# Altium PCB RF-36-S1 V1.0.PcbDoc
Units mm, origin at the board's own origin, x right, y up, seen from the top; angles counter-clockwise.
Board outline 80 x 80.71 mm, 2 copper layers (Top Layer, Bottom Layer); 68 components, 52 nets, 214 pads, 75 vias.
Unrouted connection lines stored in the file: 42.
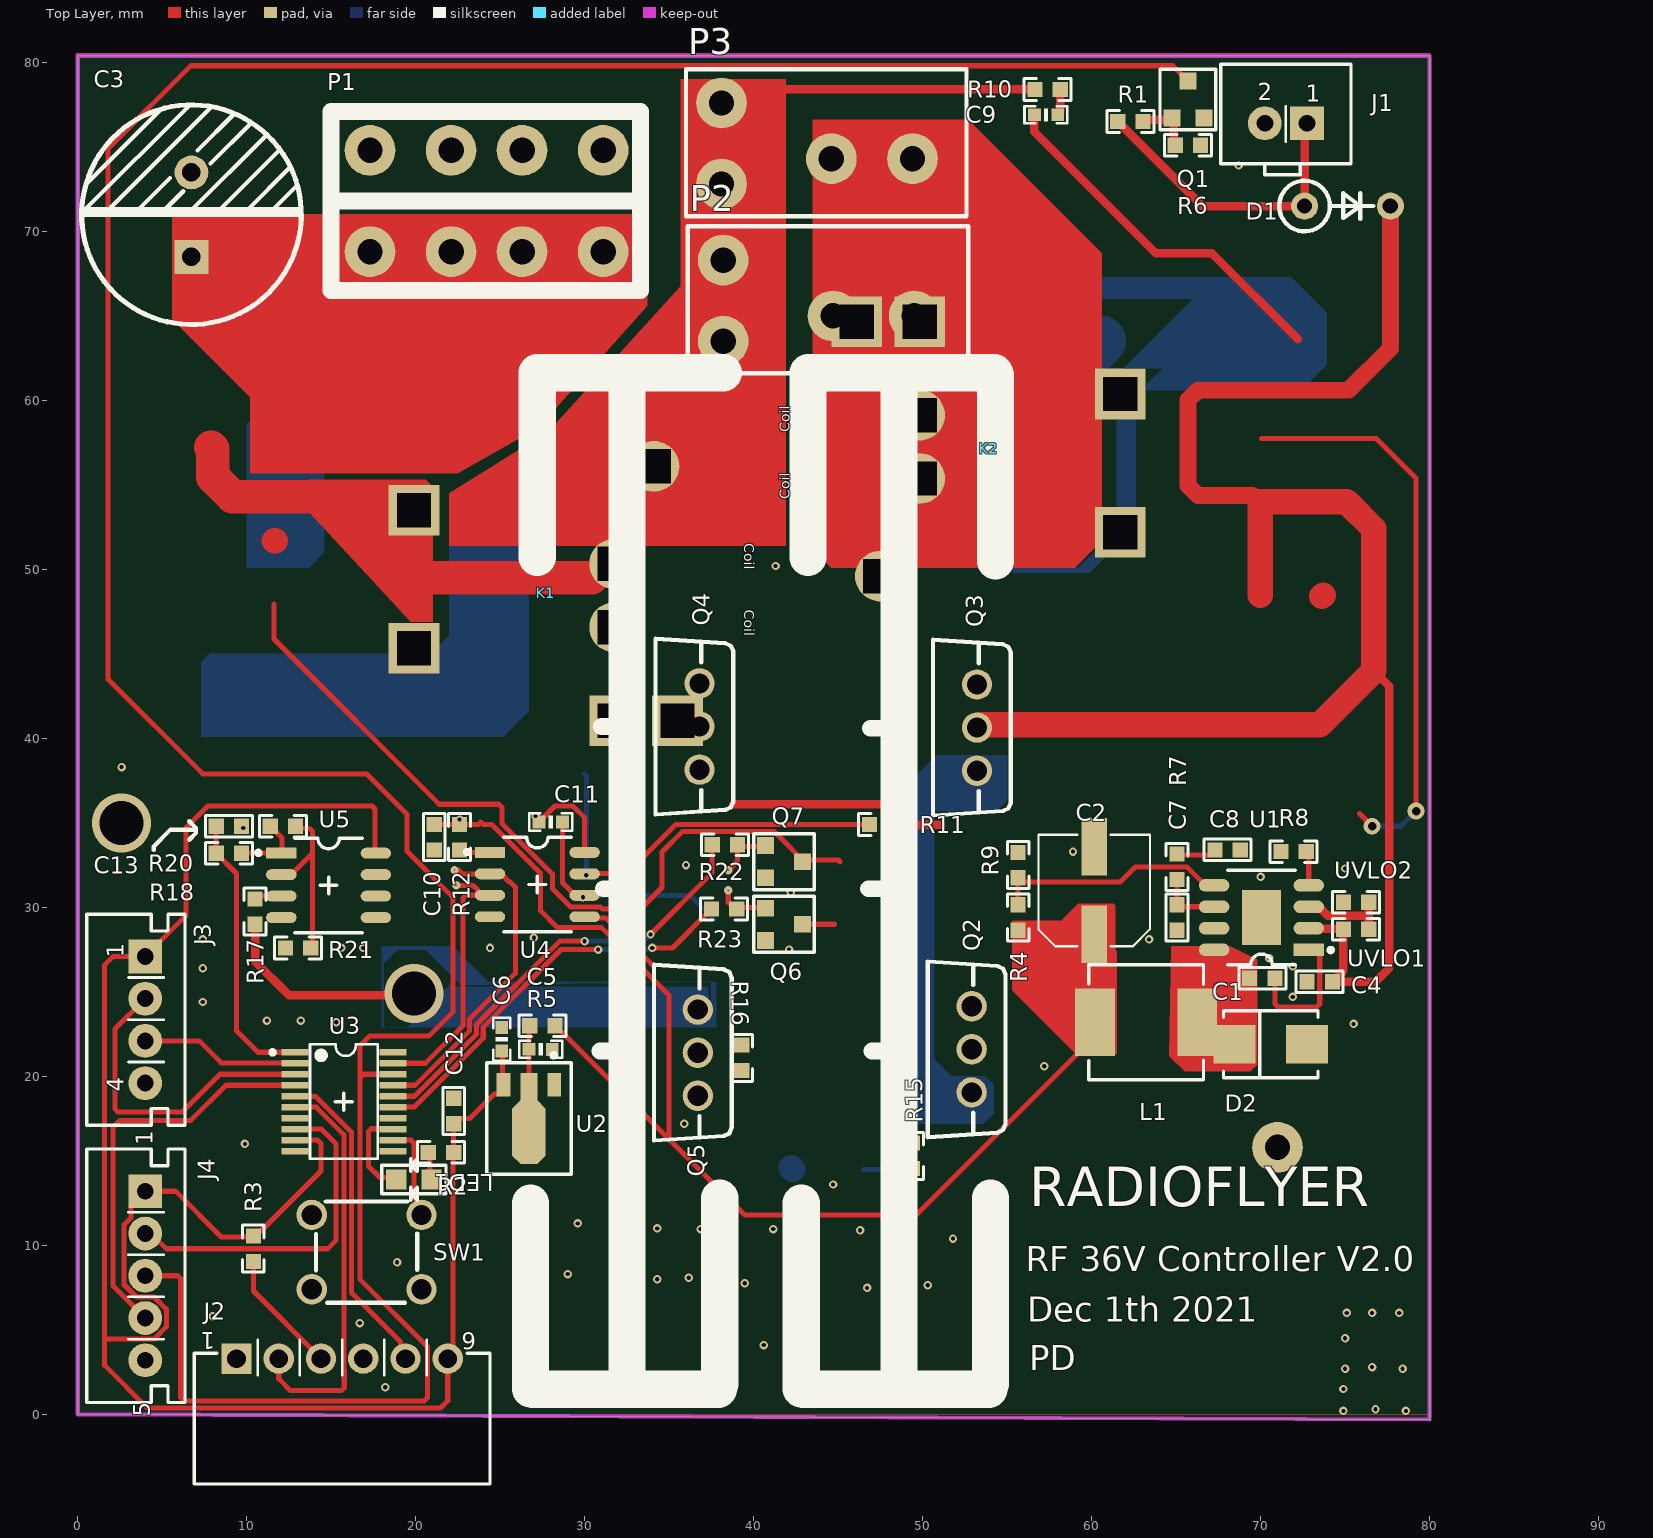
[diagram p0: Top Layer view]
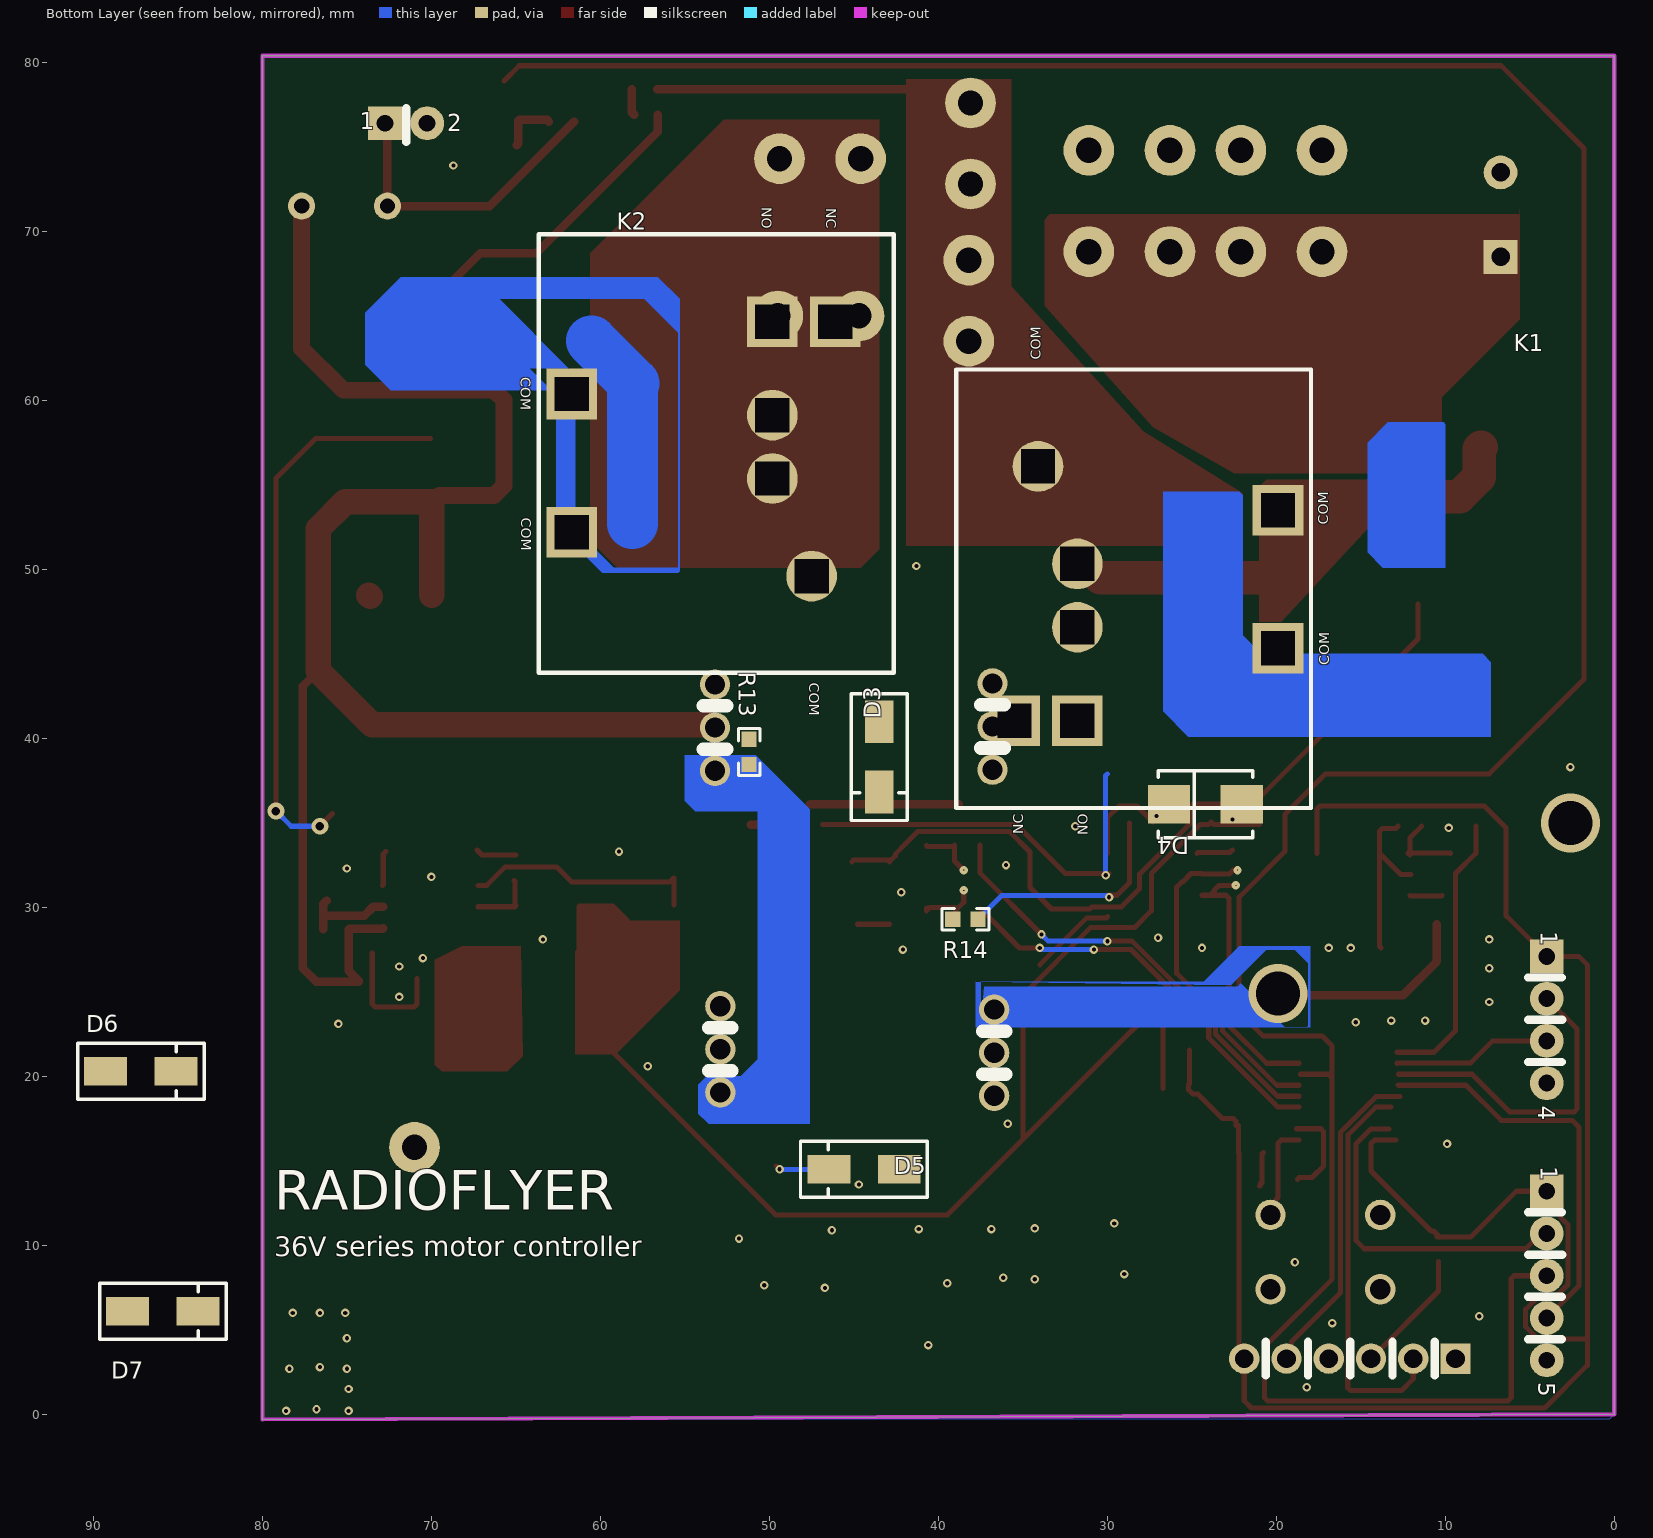
[diagram p1: Bottom Layer view, seen from below]
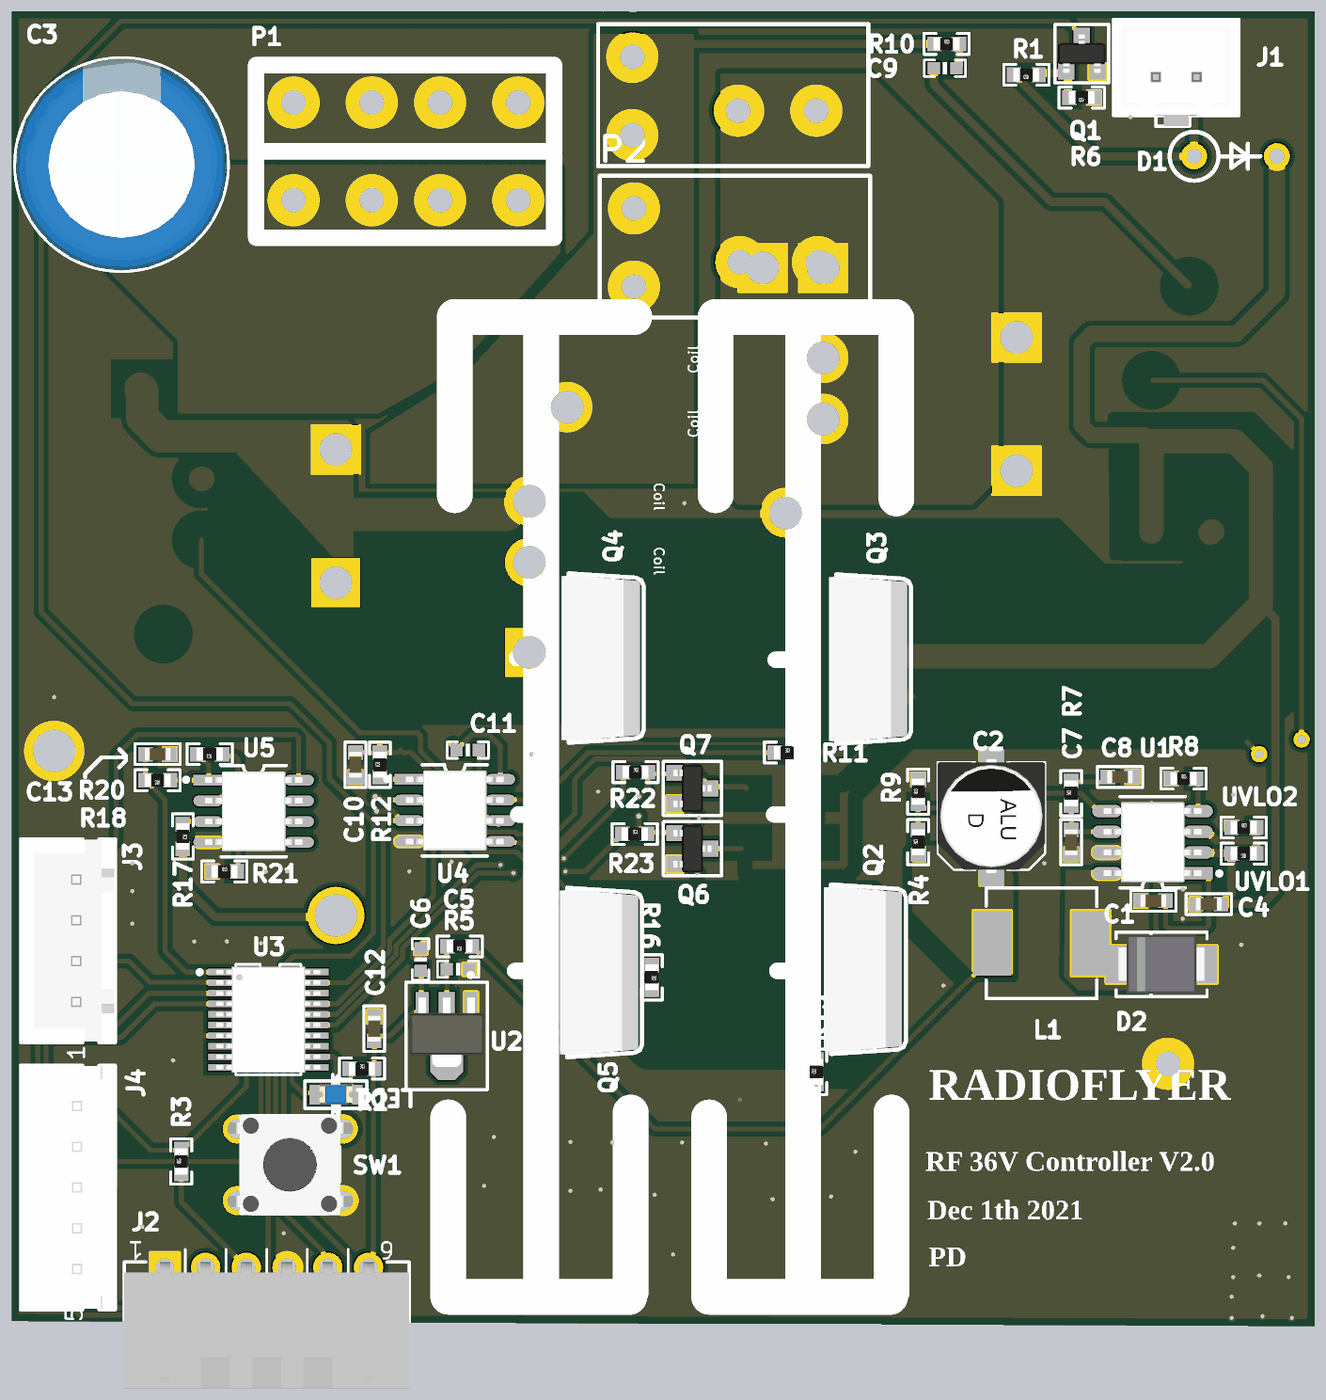
[diagram p2: 3D render of the assembled board from above, using the file's embedded part models]
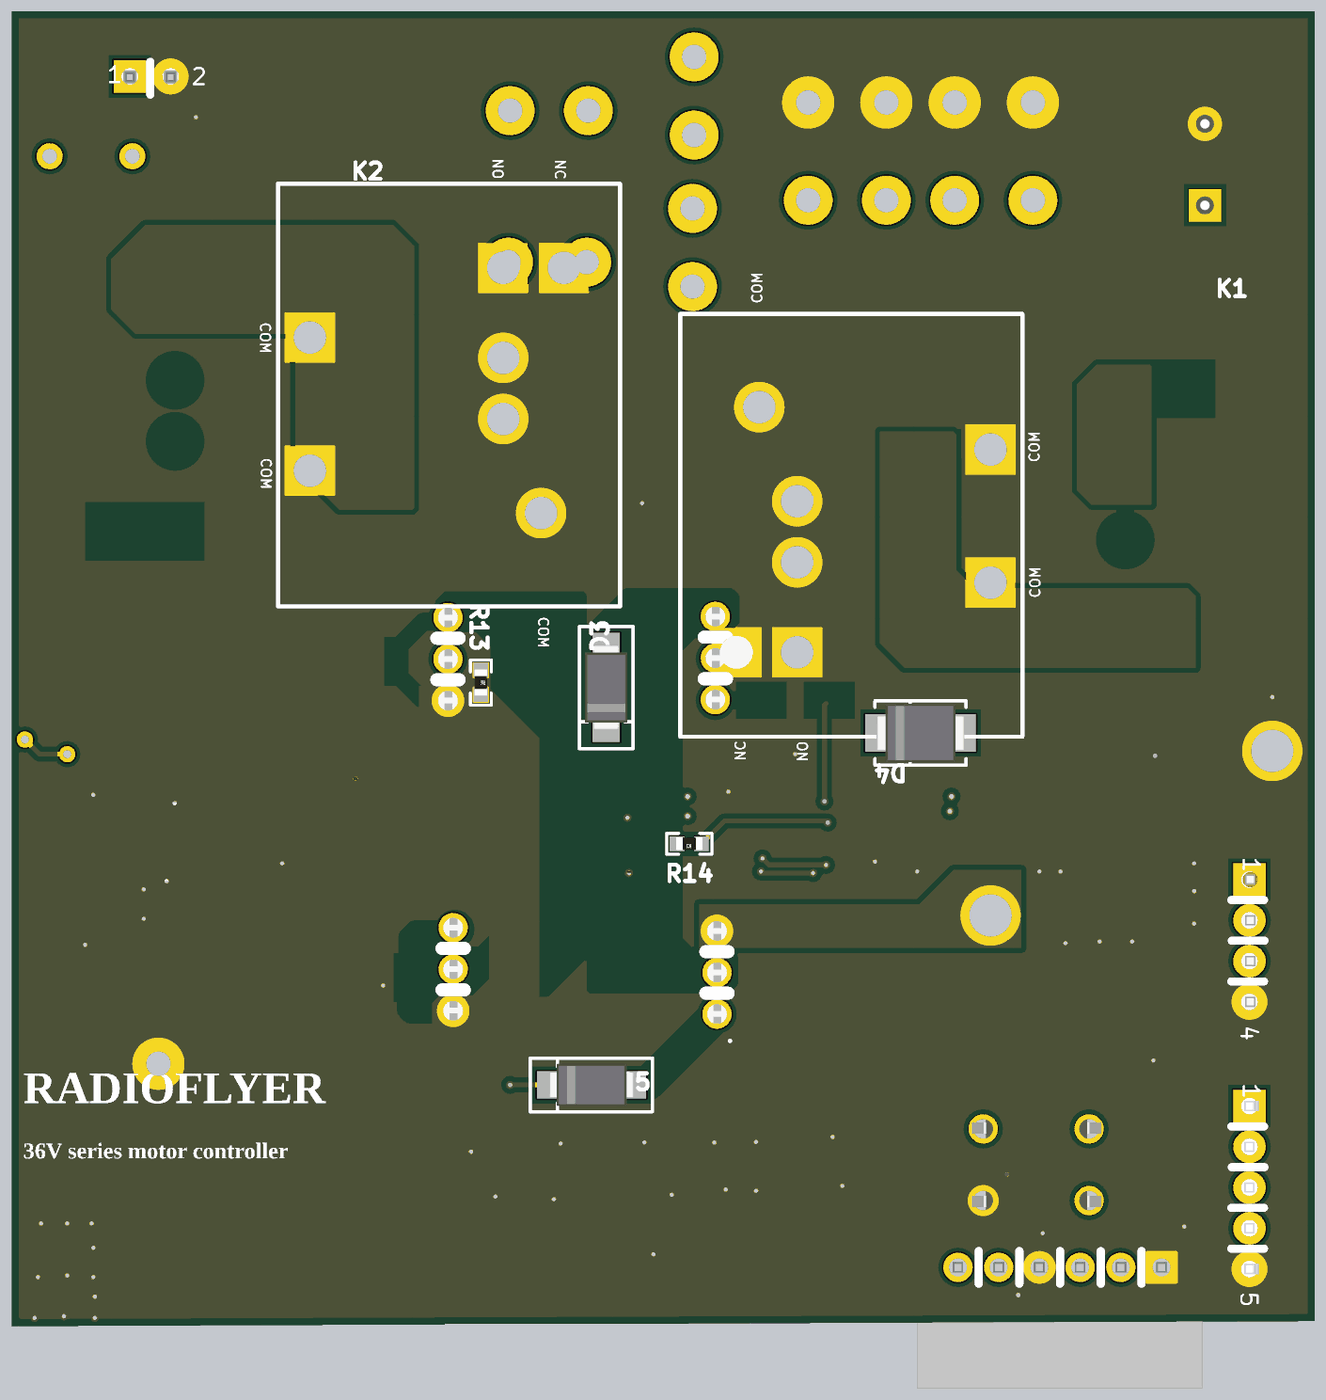
[diagram p3: 3D render of the assembled board from below, using the file's embedded part models]

## Layer stack, top to bottom
Top Solder: solder mask 0.0102, Solder Resist, Dk 3.5
Top Layer: signal copper 0.0356
Dielectric 1: dielectric 0.32, FR-4, Dk 4.8
Bottom Layer: signal copper 0.0356
Bottom Solder: solder mask 0.0102, Solder Resist, Dk 3.5

## Board outline
0,0 0,80.4 80,80.4 80,-0.308 79.999,-0.308

## Design rules (kind name [scope] priority, off if disabled: settings)
Clearance Clearance_13 [InNamedPolygon('gm') Or InNamedPolygon('NONET_L02_P007')] p1: gap=0.3 ignorepadtopadclearanceinfootprint=FALSE
Clearance Clearance_12 [InNamedPolygon('NONET_L02_P007')] p2: gap=0.3 ignorepadtopadclearanceinfootprint=FALSE
Clearance Clearance_11 [InNamedPolygon('NONET_L01_P003')] p3: gap=0.3 ignorepadtopadclearanceinfootprint=FALSE
Clearance Clearance_10 [InNamedPolygon('NONET_L01_P003')] p4: gap=0.3 ignorepadtopadclearanceinfootprint=FALSE
Clearance Clearance_9 [InNamedPolygon('NONET_L01_P003')] p5: gap=0.254 ignorepadtopadclearanceinfootprint=FALSE except(0: Arc-Hole Track-Hole SMDPad-Hole THPad-Hole Via-Hole Fill-Hole Poly-Hole Region-Hole Text-Hole)
Clearance Clearance_8 [InNamedPolygon('GND_L01_P000')] p6: gap=0.3 ignorepadtopadclearanceinfootprint=FALSE
Clearance Clearance_7 [InNamedPolygon('GND_L02_P002')] p7: gap=0.3 ignorepadtopadclearanceinfootprint=FALSE
Clearance Clearance_6 [InNamedPolygon('GND_L02_P002')] p8: gap=3 ignorepadtopadclearanceinfootprint=FALSE
Clearance Clearance_5 [InNamedPolygon('GND_L01_P000')] p9: gap=3 ignorepadtopadclearanceinfootprint=FALSE
Clearance Clearance_4 [InNamedPolygon('GND_L02_P002')] p10: gap=0.2 ignorepadtopadclearanceinfootprint=FALSE
Clearance Clearance_3 [InNamedPolygon('GND_L02_P002')] p11: gap=0.2 ignorepadtopadclearanceinfootprint=FALSE
Clearance Clearance_2 [InNamedPolygon('GND_L02_P002')] p12: gap=0.1 ignorepadtopadclearanceinfootprint=FALSE
Clearance Clearance_1 [InNamedPolygon('GND_L02_P002')] p13: gap=0.254 ignorepadtopadclearanceinfootprint=FALSE except(0: Arc-Hole Track-Hole SMDPad-Hole THPad-Hole Via-Hole Fill-Hole Poly-Hole Region-Hole Text-Hole)
Clearance [All] p14: gap=0.1 ignorepadtopadclearanceinfootprint=FALSE
PlaneConnect [All] p1: planeconnectstyle=Direct reliefexpansion=0.508 reliefentries=4 reliefconductorwidth=0.254 reliefairgap=0.254
PolygonConnect PolygonConnect_13 [All vs IsNamedPolygon('NONET_L02_P007')] p1: connectstyle=Direct reliefconductorwidth=0.254 reliefentries=4 polygonreliefangle="90 Angle" airgapwidth=0.254
PolygonConnect PolygonConnect_12 [All vs IsNamedPolygon('GND_L02_P002')] p2: thpad.connectstyle=Direct thpad.reliefconductorwidth=0.254 thpad.reliefentries=4 thpad.polygonreliefangle="90 Angle" thpad.airgapwidth=0.254 smdpad.connectstyle=Direct smdpad.reliefconductorwidth=0.254 smdpad.reliefentries=4 smdpad.polygonreliefangle="90 Angle" smdpad.airgapwidth=0.254 via.connectstyle=Relief via.reliefconductorwidth=0.254 via.reliefentries=4 via.polygonreliefangle="90 Angle" via.airgapwidth=0.254
PolygonConnect PolygonConnect_11 [All vs IsNamedPolygon('dr')] p3: thpad.connectstyle=Direct thpad.reliefconductorwidth=0.254 thpad.reliefentries=4 thpad.polygonreliefangle="90 Angle" thpad.airgapwidth=0.254 smdpad.connectstyle=Direct smdpad.reliefconductorwidth=0.254 smdpad.reliefentries=4 smdpad.polygonreliefangle="90 Angle" smdpad.airgapwidth=0.254 via.connectstyle=Relief via.reliefconductorwidth=0.254 via.reliefentries=4 via.polygonreliefangle="90 Angle" via.airgapwidth=0.254
PolygonConnect PolygonConnect_10 [All vs IsNamedPolygon('NONET_L01_P003')] p4: thpad.connectstyle=Direct thpad.reliefconductorwidth=0.254 thpad.reliefentries=4 thpad.polygonreliefangle="90 Angle" thpad.airgapwidth=0.254 smdpad.connectstyle=Direct smdpad.reliefconductorwidth=0.254 smdpad.reliefentries=4 smdpad.polygonreliefangle="90 Angle" smdpad.airgapwidth=0.254 via.connectstyle=Relief via.reliefconductorwidth=0.254 via.reliefentries=4 via.polygonreliefangle="90 Angle" via.airgapwidth=0.254
PolygonConnect PolygonConnect_9 [All vs IsNamedPolygon('NONET_L01_P003')] p5: thpad.connectstyle=Direct thpad.reliefconductorwidth=0.254 thpad.reliefentries=4 thpad.polygonreliefangle="90 Angle" thpad.airgapwidth=0.254 smdpad.connectstyle=Direct smdpad.reliefconductorwidth=0.254 smdpad.reliefentries=4 smdpad.polygonreliefangle="90 Angle" smdpad.airgapwidth=0.254 via.connectstyle=Relief via.reliefconductorwidth=0.254 via.reliefentries=4 via.polygonreliefangle="90 Angle" via.airgapwidth=0.254
PolygonConnect PolygonConnect_8 [All vs IsNamedPolygon('NONET_L01_P003')] p6: thpad.connectstyle=Direct thpad.reliefconductorwidth=0.254 thpad.reliefentries=4 thpad.polygonreliefangle="90 Angle" thpad.airgapwidth=0.254 smdpad.connectstyle=Direct smdpad.reliefconductorwidth=0.254 smdpad.reliefentries=4 smdpad.polygonreliefangle="90 Angle" smdpad.airgapwidth=0.254 via.connectstyle=Relief via.reliefconductorwidth=0.254 via.reliefentries=4 via.polygonreliefangle="90 Angle" via.airgapwidth=0.254
PolygonConnect PolygonConnect_7 [All vs IsNamedPolygon('NONET_L01_P003')] p7: thpad.connectstyle=Direct thpad.reliefconductorwidth=0.254 thpad.reliefentries=4 thpad.polygonreliefangle="90 Angle" thpad.airgapwidth=0.254 smdpad.connectstyle=Direct smdpad.reliefconductorwidth=0.254 smdpad.reliefentries=4 smdpad.polygonreliefangle="90 Angle" smdpad.airgapwidth=0.254 via.connectstyle=Relief via.reliefconductorwidth=0.254 via.reliefentries=4 via.polygonreliefangle="90 Angle" via.airgapwidth=0.254
PolygonConnect PolygonConnect_6 [All vs IsNamedPolygon('GND_L01_P000')] p8: thpad.connectstyle=Direct thpad.reliefconductorwidth=0.254 thpad.reliefentries=4 thpad.polygonreliefangle="90 Angle" thpad.airgapwidth=0.254 smdpad.connectstyle=Direct smdpad.reliefconductorwidth=0.254 smdpad.reliefentries=4 smdpad.polygonreliefangle="90 Angle" smdpad.airgapwidth=0.254 via.connectstyle=Relief via.reliefconductorwidth=0.254 via.reliefentries=4 via.polygonreliefangle="90 Angle" via.airgapwidth=0.254
PolygonConnect PolygonConnect_5 [All vs IsNamedPolygon('GND_L02_P002')] p9: thpad.connectstyle=Direct thpad.reliefconductorwidth=0.254 thpad.reliefentries=4 thpad.polygonreliefangle="90 Angle" thpad.airgapwidth=0.254 smdpad.connectstyle=Direct smdpad.reliefconductorwidth=0.254 smdpad.reliefentries=4 smdpad.polygonreliefangle="90 Angle" smdpad.airgapwidth=0.254 via.connectstyle=Relief via.reliefconductorwidth=0.254 via.reliefentries=4 via.polygonreliefangle="90 Angle" via.airgapwidth=0.254
PolygonConnect PolygonConnect_4 [All vs IsNamedPolygon('GND_L02_P002')] p10: thpad.connectstyle=Direct thpad.reliefconductorwidth=0.254 thpad.reliefentries=4 thpad.polygonreliefangle="90 Angle" thpad.airgapwidth=0.254 smdpad.connectstyle=Direct smdpad.reliefconductorwidth=0.254 smdpad.reliefentries=4 smdpad.polygonreliefangle="90 Angle" smdpad.airgapwidth=0.254 via.connectstyle=Relief via.reliefconductorwidth=0.254 via.reliefentries=4 via.polygonreliefangle="90 Angle" via.airgapwidth=0.254
PolygonConnect PolygonConnect_3 [All vs IsNamedPolygon('GND_L02_P002')] p11: thpad.connectstyle=Direct thpad.reliefconductorwidth=0.254 thpad.reliefentries=4 thpad.polygonreliefangle="90 Angle" thpad.airgapwidth=0.254 smdpad.connectstyle=Direct smdpad.reliefconductorwidth=0.254 smdpad.reliefentries=4 smdpad.polygonreliefangle="90 Angle" smdpad.airgapwidth=0.254 via.connectstyle=Relief via.reliefconductorwidth=0.254 via.reliefentries=4 via.polygonreliefangle="90 Angle" via.airgapwidth=0.254
PolygonConnect PolygonConnect_2 [All vs IsNamedPolygon('GND_L02_P002')] p12: thpad.connectstyle=Direct thpad.reliefconductorwidth=0.254 thpad.reliefentries=4 thpad.polygonreliefangle="90 Angle" thpad.airgapwidth=0.254 smdpad.connectstyle=Direct smdpad.reliefconductorwidth=0.254 smdpad.reliefentries=4 smdpad.polygonreliefangle="90 Angle" smdpad.airgapwidth=0.254 via.connectstyle=Relief via.reliefconductorwidth=0.254 via.reliefentries=4 via.polygonreliefangle="90 Angle" via.airgapwidth=0.254
PolygonConnect PolygonConnect_1 [All vs IsNamedPolygon('GND_L02_P002')] p13: thpad.connectstyle=Direct thpad.reliefconductorwidth=0.254 thpad.reliefentries=4 thpad.polygonreliefangle="90 Angle" thpad.airgapwidth=0.254 smdpad.connectstyle=Direct smdpad.reliefconductorwidth=0.254 smdpad.reliefentries=4 smdpad.polygonreliefangle="90 Angle" smdpad.airgapwidth=0.254 via.connectstyle=Relief via.reliefconductorwidth=0.254 via.reliefentries=4 via.polygonreliefangle="90 Angle" via.airgapwidth=0.254
PolygonConnect [All] p14: connectstyle=Direct reliefconductorwidth=0.254 reliefentries=4 polygonreliefangle="90 Angle" airgapwidth=0.254
RoutingVias [All] p1: holewidth=0.711 width=1.27 viastyle="Through Hole" minholewidth=0.711 minwidth=1.27 maxholewidth=0.711 maxwidth=1.27
SolderMaskExpansion [All] p1: expansion=0.102 istentingtop=FALSE
Width [All] p1: maxlimit=3 minlimit=0.254 preferedwidth=0.254
29 further rules are at their usual default settings.

## Components (designator, comment, footprint, x,y, rotation, side; value= is the part's Value field where it differs from the comment)
C1 "PXL456470-1530" CAPC0603-RW 70.1,25.8 r180 top value=0.1uF
C2 "PBE099540-1010" "CASE - D" 60.15,31 r270 top value=20uF
C3 "PVE599570-4710" CAP_Radial_D13L25P5.0 6.735,70.989 r270 top value=1000uF
C4 "PXL456470-1530" CAPC0603-RW 73.5,25.6 r180 top value=4.7uF
C5 "4.7uF" 0603P 27.4,21.6 r180 top
C6 "4.7uF" 0603P 25.1,22.2 r270 top
C7 "PXL456470-1530" CAPC0603-RW 65.05,29.4 r270 top value=68pF
C8 "PXL456470-1530" CAPC0603-RW 68.05,33.4 r0 top value=6.8nF
C9 "104" 0603P 57.3,76.9 r0 top
C10 "PXL456470-1530" CAPC0603-RW 21.1,34.15 r270 top value=1uF
C11 "4.7uF" 0603P 28,35.05 r180 top
C12 "PXL456470-1530" CAPC0603-RW 22.25,17.95 r90 top value=4.7uF
C13 "PXL456470-1530" CAPC0603-RW 8.95,34.8 r0 top value=104
D1 "RAD114004-0010" DO-41-V-P5.08 72.6,71.5 r0 top
D2 "T571002930249" SMB 70.6,21.9 r180 top
D3 "SMAJ36A-13-F" SMA 43.5,38.9 r270 bottom
D4 "T571002930249" SMB 24.2,36.1 r0 bottom
D5 "SMAJ36A-13-F" SMA 44.4,14.5 r0 bottom
D6 "SMAJ36A-13-F" SMA 87.2,20.3 r180 bottom
D7 "SMAJ36A-13-F" SMA 85.9,6.1 r180 bottom
J1 "T690300125300" "CONN 2P PH=2.5mm HAA250A-2 WHITE" 71.5,76.4 r0 top value=2.5mm
J2 "T690300121600" "CONN 6P PH=2.5mm RA XHB-6AW-KL" 15.65,3.3 r180 top value=2.5mm
J3 "CCN250000-0104" "CONN 4P PH=2.5mm B4B-XH-A" 4,23.35 r90 top value=2.5mm
J4 "CCN250000-0105" "CONN 5P PH=2.5mm B5B-XH-A" 4,8.2 r90 top value=2.5mm
K1 "SLB4119" "RELAY SLB4119" 21.7,56 r270 top
K2 "SLB4119" "RELAY SLB4119" 59.9,49.7 r90 top
L1 "T621000090500" "IND CSAB0740" 63.225,23.2 r180 top value=22uH
LED1 "T575011290263" LED0805-Blue 19.9,13.9 r180 top
P1 "CJP012009-0050" "Bat connector" 31.1,68.8 r180 top
P2 "CJP012009-0050" "Motor connector" 36.1,61.6 r90 top
P3 "CJP012009-0050" "Motor connector" 36,70.9 r90 top
Q1 "RCN000846-0001" SOT23-132-RW 65.7,77.8 r0 top
Q2 "RHM120060-1001" TO220-F 52.9,19.05 r90 top
Q3 "RHM120060-1001" TO220-F 53.219,38.087 r90 top
Q4 "RHM120060-1001" TO220-F 36.8,38.15 r90 top
Q5 "RHM120060-1001" TO220-F 36.7,18.85 r90 top
Q6 "RCN000846-0001" SOT23-132-RW 41.8,29 r270 top
Q7 "RCN000846-0001" SOT23-132-RW 41.8,32.7 r270 top
R1 "T501348102129" 0603-RW 62.3,76.5 r180 top value=22k
R2 "T501348102129" 0603-RW 21.5,15.5 r0 top value=1K
R3 "T501348102129" 0603-RW 10.4,9.8 r90 top value=101
R4 "T501348102129" 0603-RW 55.65,29.4 r90 top value=182K
R5 "T501348102129" 0603-RW 27.5,23 r180 top value=0ohm
R6 "T501348102129" 0603-RW 65.7,75.1 r180 top value=1k
R7 "T501348102129" 0603-RW 65.05,32.4 r90 top value=10.5K
R8 "T501348102129" 0603-RW 71.95,33.3 r0 top value=243K
R9 "T501348102129" 0603-RW 55.65,32.5 r90 top value=10.2K
R10 "T501348102129" 0603-RW 57.4,78.4 r0 top value=10R
R11 "T501348102129" 0603-RW 47.6,34.9 r0 top value=4.7R
R12 "T501348102129" 0603-RW 22.6,34.15 r90 top value=4.7R
R13 "T501348102129" 0603-RW 51.2,39.2 r270 bottom value=10K
R14 "T501348102129" 0603-RW 38.4,29.3 r0 bottom value=4.7R
R15 "T501348102129" 0603-RW 49.4,15.3 r90 top value=100R
R16 "T501348102129" 0603-RW 39.3,21.1 r270 top value=10K
R17 "T501348102129" 0603-RW 10.5,29.75 r270 top value=102
R18 "T501348102129" 0603-RW 8.95,33.2 r180 top value=1K
R20 "T501348102129" 0603-RW 12.15,34.8 r180 top value=21K
R21 "T501348102129" 0603-RW 13.05,27.6 r0 top value=1K
R22 "T501348102129" 0603-RW 38.3,33.7 r0 top value=2.2k
R23 "T501348102129" 0603-RW 38.25,29.9 r0 top value=2.2k
SW1 "MSWA06012-0010" TS_6X6X8_DIP 17.1,9.6 r0 top value=TACT
U1 "TPS54540" SO8-EP 70.05,29.4 r180 top
U2 "7805" SOT89 26.7,18.1 r180 top
U3 "RCI800336-0001" TSSOP20 15.75,18.5 r270 top
U4 "T610900027257" SO8 27.2,31.35 r0 top
U5 "RCI000358-0001" SO8 14.85,31.3 r0 top
UVLO1 "T501348102129" 0603-RW 75.65,28.7 r180 top value=1.676M
UVLO2 "T501348102129" 0603-RW 75.65,30.3 r0 top value=60K

## Footprints (in the part's own frame and the unit in brackets; to place one, negate y for a bottom-side part, rotate by r counter-clockwise, add the part's x,y. Pads: shape width x height; smd on the part's side, far side on the other; paste and mask are expansions set on the pad)
0603-RW [mm]
  rect 0.9x0.9 smd mask+0.05: 1(-0.75,0) 2(0.75,0)
  silkscreen extent -1.39,-0.64 1.39,0.64, body extent -0.8,-0.41 0.8,0.39, height 0.3
0603P [mil]
  rect 30x30 smd: 1(-27,0) 2(27.5,-0.06)
  silkscreen extent -50,-20 50,20
"Bat connector" [mm]
  round 3 hole 1.5: 1(0,0) 1(4.8,0) 1(9,0) 1(13.8,0) 2(0,-6) 2(4.8,-6) 2(9,-6) 2(13.8,-6)
  silkscreen extent -2.2,-8.3 16.1,2.3
CAP_Radial_D13L25P5.0 [mm] "Body: Dia. 14mm(Max,),Height:26.5mm(max),Pitch:5mm"
  rect 2x2 hole 1.1 mask+0.05: 1(2.5,0)
  round 2 hole 1.1 mask+0.05: 2(-2.5,0)
  silkscreen extent -6.5,-6.5 6.5,6.5, body extent -6.5,-6.49 6.5,6.49, height 25
CAPC0603-RW [mm] "Body size:  L1.6XW0.8XT0.8mm"
  rect 0.9x0.9 smd mask+0.05: 1(-0.75,0) 2(0.75,0)
  silkscreen extent -1.39,-0.64 1.39,0.64, body extent -0.8,-0.4 0.8,0.4, height 0.8
"CASE - D" [mm] "CHIP ELECT CAP D6.3mm * H5.4mm"
  rect 3.4x1.5 smd mask+0.05: 1(2.6,0) 2(-2.6,0)
  silkscreen extent -3.3,-3.3 3.3,3.3, body extent -3.5,-3.3 3.5,3.3, height 5.4
"CONN 2P PH=2.5mm HAA250A-2 WHITE" [mm] "CONN 2P PH=2.5mm HAA250A-2 WHITE"
  rect 2x2 hole 1: 1(1.25,0)
  round 2 hole 1: 2(-1.25,0)
  silkscreen extent -3.85,-3.05 3.85,3.5, body extent -3.75,-3.05 3.75,3.5, height 7.4
"CONN 4P PH=2.5mm B4B-XH-A" [mm] "CONN 4P PH=2.5mm B4B-XH-A H7mm"
  rect 2x2 hole 1: 1(3.75,0)
  round 2 hole 1: 2(1.25,0) 3(-1.25,0) 4(-3.75,0)
  silkscreen extent -6.25,-2.35 6.25,3.46, body extent -6.2,-2.3 6.2,3.45, height 7
"CONN 5P PH=2.5mm B5B-XH-A" [mm] "CONN 5P PH=2.5mm B5B-XH-A H7mm"
  rect 2x2 hole 1: 1(5,0)
  round 2 hole 1: 2(2.5,0) 3(0,0) 4(-2.5,0) 5(-5,0)
  silkscreen extent -7.5,-2.35 7.5,3.47, body extent -7.45,-2.35 7.45,3.4, height 7
"CONN 6P PH=2.5mm RA XHB-6AW-KL" [mm] "WAFER 6P XHB-6AW-KL"
  rect 1.8x1.8 hole 1.1: 1(6.25,0)
  round 1.8 hole 1.1: 2(3.75,0) 3(1.25,0) 4(-1.25,0) 5(-3.75,0) 6(-6.25,0)
  silkscreen extent -8.75,-1.11 8.75,7.43, body extent -8.75,-0.31 8.75,7.42, height 6.56
DO-41-V-P5.08 [mm]
  round 1.6 hole 0.91: 1(0,0) 2(5.08,0)
  silkscreen extent -1.5,-1.5 4.06,1.5, body extent -1.42,-1.4 5.53,1.4, height 7.45
"IND CSAB0740" [mm] "6.6mmX6.6mm H3.8mm"
  rect 2.35x4 smd: 1(-3.025,0) 2(3.025,0)
  silkscreen extent -3.4,-3.4 3.4,3.4, body extent -3.5,-3.4 3.5,3.4, height 3.8
LED0805-Blue [mil]
  rect 47x47 smd mask+1.97: 1(-41,0) 2(41,0)
  silkscreen extent -75,-48 75,48, body extent -40,-25 40,24, height 43
"Motor connector" [mm]
  round 3 hole 1.5: 1(1.9,-2.1) 1(6.7,-2.1) 2(3.4,-13.4) 2(3.4,-8.6)
  silkscreen extent 0,-16.6 8.7,0
"RELAY SLB4119" [mm] "HFD23\012-1ZS"
  rect 3x3 hole 2 square mask+0.05: 1(14.949,10.075) 2(14.949,13.8) 6(2.499,-1.8) 7(10.674,-1.8)
  round 3 hole 2 square mask+0.05: 3(9.424,10.075) 4(5.674,10.075) 5(-0.101,12.4)
  body extent -5.47,-3.55 20.46,17.45, height 0.25
SMA [mm] "SMA Body W 2.90mm L 4.60mm Max"
  rect 2.54x1.676 smd: 1(-2.083,0) 2(2.083,0)
  silkscreen extent -3.73,-1.65 3.76,1.65, body extent -2.6,-1.3 2.6,1.3, height 2.4
SMB [mm] "SMB Body W 3.94mm L 4.70mm Max"
  rect 2.5x2.3 smd: 1(-2.15,0) 2(2.15,0)
  silkscreen extent -2.79,-1.98 2.79,1.98, body extent -2.7,-1.8 2.7,1.8, height 2.27
SO8 [mm] "SO8 8Pin Pitch 1.27mm Body 4.9mm X 3.9mm"
  rect 1.8x0.65 smd: 1(-2.8,1.905)
  oval 1.8x0.65 smd: 2(-2.8,0.635) 3(-2.8,-0.635) 4(-2.8,-1.905) 5(2.8,-1.905) 6(2.8,-0.635) 7(2.8,0.635) 8(2.8,1.905)
  silkscreen extent -4.25,-2.8 2,2.8, body extent -3,-2.45 3,2.45, height 1.75
SO8-EP [mm] "SO8 8Pin Exposed Pad, Pitch 1.27mm Body 4.9mm X 3.9mm"
  rect 2.3x3.25 smd: 0(0,0)
  rect 1.8x0.75 smd: 1(-2.8,1.905)
  oval 1.8x0.75 smd: 2(-2.8,0.635) 3(-2.8,-0.635) 4(-2.8,-1.905) 5(2.8,-1.905) 6(2.8,-0.635) 7(2.8,0.635) 8(2.8,1.905)
  silkscreen extent -4.2,-2.8 2,2.8, body extent -3,-2.45 3,2.45, height 1.75
SOT23-132-RW [mm]
  rect 1x1 smd: 1(-0.95,-1.1) 2(0.95,-1.1) 3(0,1.1)
  silkscreen extent -1.65,-1.79 1.65,1.79, body extent -1.46,-1.17 1.46,1.17, height 1
SOT89 [mm]
  rect 0.8x1.4 smd: 1(-1.5,-1.4) 3(1.5,-1.4)
  rect 1x1.854 smd: 2(0,-1.173)
  oct 2x3.8 smd: 4(0,1.4)
  silkscreen extent -2.5,-3.25 2.5,3.9, body extent -2.31,-1.76 2.29,2.49, height 1.59
TO220-F [mm]
  round 1.8 hole 1.2: 1(0,0) 2(2.55,0) 3(5.1,0)
  silkscreen extent -2.65,-2 7.75,2.6, body extent -2.53,-1.76 7.63,3.04, height 21.3
TS_6X6X8_DIP [mm] "TACT Switch DIP Body  L6*W6*H8mm"
  round 1.8 hole 1.2 mask+0.05: 1(-3.25,2.2) 2(3.25,2.2) 3(-3.25,-2.2) 4(3.25,-2.2)
  silkscreen extent -3,-3 3,3, body extent -3.98,-3.1 3.94,3.1, height 8
TSSOP20 [mm] "TSSOP,Exposed Paddle,0.65mm,pitch;20 pin,4.60mm W X 6.6mm L X 1.20mm H body"
  rect 0.4x1.6 smd: 1(-2.925,-2.9) 2(-2.275,-2.9) 3(-1.625,-2.9) 4(-0.975,-2.9) 5(-0.325,-2.9) 6(0.325,-2.9) 7(0.975,-2.9) 8(1.625,-2.9) 9(2.275,-2.9) 10(2.925,-2.9) 11(2.925,2.9) 12(2.275,2.9) 13(1.625,2.9) 14(0.975,2.9) 15(0.325,2.9) 16(-0.325,2.9) 17(-0.975,2.9) 18(-1.625,2.9) 19(-2.275,2.9) 20(-2.925,2.9)
  silkscreen extent -3.4,-4.32 3.37,2, body extent -3.25,-3.2 3.25,3.2, height 1.1

## Part data
C1: library part "CAP0603 0.015uF 50V 10%", "GP CHIP CAP 0.015uF 50V 10% 0603 TYPE X7R", PACKAGE=CAPC0603, Tolerance=10%, Voltage=10V, Customer Specific=N/A, DIP&SMD=SMD, Other=X7R, SAP=T542021537508, Type=Capacitor, Vendor Code=10010262, Vendor Name=东莞市晴远电子有限公司
C2: library part "CAP E 100uF 16V 20% SMD", "CHIP ELECT 100uF 16V 20% SMD 6.3x5.4mm", PACKAGE="CASE - D", Tolerance=20%, Voltage=16V, Customer Specific=N/A, DIP&SMD=SMD, SAP=T551101434030, Type=Capacitor, Vendor Code=10020343, Vendor Name=深圳市春明电子有限公司
C3: library part "CAP E Aluminum 470uF 50V 20% - PVE599570-4710", "COND ELECT 470uF 50V 20% 105 13x25mm", PACKAGE=470uF/50V, Tolerance=20%, Voltage=50V, Customer Specific=N/A, DIP&SMD=DIP, MFG=佳维诚, SAP=T552471464020, Type=Capacitor, Vendor Code=10020154, Vendor Name=惠州市佳维诚电子有限公司
C4: library part "CAP0603 0.015uF 50V 10%", "GP CHIP CAP 0.015uF 50V 10% 0603 TYPE X7R", PACKAGE=CAPC0603, Tolerance=10%, Voltage=50V, Customer Specific=N/A, DIP&SMD=SMD, Other=X7R, SAP=T542021537508, Type=Capacitor, Vendor Code=10010262, Vendor Name=东莞市晴远电子有限公司
C5 C6 C9 C11: library part C
C7 C8: library part "CAP0603 0.015uF 50V 10%", "GP CHIP CAP 0.015uF 50V 10% 0603 TYPE X7R", PACKAGE=CAPC0603, Tolerance=10%, Voltage=3V, Customer Specific=N/A, DIP&SMD=SMD, Other=X7R, SAP=T542021537508, Type=Capacitor, Vendor Code=10010262, Vendor Name=东莞市晴远电子有限公司
C10: library part "CAP0603 0.015uF 50V 10%", "GP CHIP CAP 0.015uF 50V 10% 0603 TYPE X7R", PACKAGE=CAPC0603, Tolerance=10%, Voltage=16V, Customer Specific=N/A, DIP&SMD=SMD, Other=X7R, SAP=T542021537508, Type=Capacitor, Vendor Code=10010262, Vendor Name=东莞市晴远电子有限公司
C12 C13: library part "CAP0603 0.015uF 50V 10%", "GP CHIP CAP 0.015uF 50V 10% 0603 TYPE X7R", PACKAGE=CAPC0603, Tolerance=10%, Voltage=6V, Customer Specific=N/A, DIP&SMD=SMD, Other=X7R, SAP=T542021537508, Type=Capacitor, Vendor Code=10010262, Vendor Name=东莞市晴远电子有限公司
D1: library part 1N4004S, "GP DIODE  1N4004 1A 280VRMS DO-41", Current=1A, PACKAGE=DO-41, Voltage=400V, Customer Specific=N/A, DIP&SMD=DIP, MFG=PANJIT, MFG Part=1N5401, SAP=T571002250423, Type=DIODE, Vendor Code=10020343, Vendor Name=深圳市春明电子有限公司
D2 D4: library part "DIO ER3DB", "DIODE 200V 3A ER3DB M.C.C K", Current=3A, PACKAGE=SMB, Voltage=50V~1000V, CREATE_NAME=cherry, CREATE_TIME=20190104, Customer Specific=N/A, DIP&SMD=SMD, MFG=MCCSEMI, MFG Part=ER3AB-ER3MB(SMB), SAP=T571002930249, Type=DIODE
D3 D5 D6 D7: PACKAGE=SMA, CREATE_NAME=Nathan, CREATE_TIME=16-Oct-2020, Customer Specific=N/A, DIP&SMD=SMD, MFG=DIODE, MFG Part=SMAJ36A-13-F, Type=DIODE
J1: library part "CONN 2P PH=2.5mm HAA250A-2 BLACK", "CONNECTOR HA2.5 2PIN BLACK K", Current=3A, CREATE_NAME=Nathan, CREATE_TIME=24-Nov-2017, DIP&SMD=DIP, MFG=金瑞康, MFG Part="HAA250A-2 BLACK", SAP=T690300125300, Type=Connector
J2: library part "CONN PH 6P PH=2.5mm RA XHB-6AW-KL", "CONNECTOR 6PIN P=2.5 WHITE 90 K", CREATE_NAME=Nathan, CREATE_TIME=27-Sep-2017, DIP&SMD=DIP, MFG=金佳电子, MFG Part=XHB-6AW-KL, SAP=T690300121600, Type=Connector
J3: library part "CONN 4P PH=2.5mm B4B-XH-A", "GP CONNECTOR B4B-XH-A 4 PIN", Current=3A, DIP&SMD=DIP, SAP=T690300029000, Type=Connector, Vendor Code=10009989, Vendor Name=亿源电子有限公司
J4: library part "CONN 5P PH=2.5mm B5B-XH-A", "CONNECTOR B5B-XH-A 5 PIN", Current=3A, DIP&SMD=DIP, SAP=T690300029100, Type=Connector, Vendor Code=10020373, Vendor Name=深圳市利民丰电子有限公司
K1 K2: library part "Relay SLB4119 7P"
L1: library part "IND 22uH CSAB0740-220M", "22UH 4A 100K SMD CODACA CSAB074 K", Current=4A, Tolerance=20%, CREATE_NAME=Nathan, CREATE_TIME=30-Aug-2019, Customer Specific=N/A, DCR="125 mohm (max.)", DIP&SMD=SMD, MFG=CODACA, MFG Part=CSAB0740-220M, SAP=T621000090500, Type=INDUCTOR
LED1: library part LED0805B-H-0805AW61B008-Z2, "LED 750 2.0X1. H-0805AW61B0 HONGBRIG G", Color="Ice Blue", PACKAGE=0805, CREATE_NAME=Nathan, CREATE_TIME=31-OCT-2016, DIP&SMD=SMD, MFG="HONGBRIGHT (弘亮光電)", MFG Part=H-0805AW61B008-Z2, SAP=T575011290263, Type=LED
P1 P2 P3: library part "AC INLET 2P DB8-6S1 N-Polar", "AC SOCKET 2P D2.36 2.5A 250V VDE BLACK", Current=5A, DIP&SMD=DIP, MFG=金明浩, MFG Part="DB8-6S1 N-Polar", SAP=T690300011500, Type=Connector, Vendor Code=10010007, Vendor Name=深圳市金明浩电子科技有限公司
Q1 Q6 Q7: library part LBC846BLT1G, "NPN LRC BC846BLT1G SOT23", PACKAGE=SOT-23, Customer Specific=N/A, DIP&SMD=SMD, MFG=LRC, MFG Part=2N5551, SAP=T581003640437, Type=NPN, Vendor Code=10009129, Vendor Name="WING HING ENTERPRISE CO"
Q2 Q3 Q4 Q5: library part 12N60L-A-TF3-T, "MOSFET 3PIN 12N60L-A -TF3-T TO-220F", Current=12A, PACKAGE=TO220, Voltage=600V, Customer Specific=N/A, DIP&SMD=DIP, MFG=UTC, MFG Part=12N60L-A-TF3-T, SAP=T586002570924, Type=MOSFET, Vendor Code=10020223, Vendor Name=丰富利科技（深圳）有限公司
R1 R2 R3 R4 R5 R6 R7 R8 R9 R10 R11 R12 R13 R14 R15 R16 R17 R18 R20 R21 R22 R23 UVLO1 UVLO2: library part "RES0603 1/16W 0.1% 3.48K OHM", "CHIP 3.48K OHM 50PPM +-0.1% 0603 WALS L", PACKAGE=0603, Power="1/16 W", CREATE_NAME=Tom, CREATE_TIME=12-Apr-2016, Customer Specific=N/A, DIP&SMD=SMD, MFG=WALSIN, MFG Part=WF06T3481BTL, SAP=T501348102129, TOL=0.1%, Type=Resistor
SW1: library part "TACT SW H8.0 DIP", "TACT SWITC 4P L6*W6*H8mm", DIP&SMD=DIP, Force=250gf, MFG="ShenZhen GanHad", MFG Part=TS-06V-8HM, SAP=T670200001500, Type=Switch
U1: "4.5-42V input 5A output"
U3: library part N76E003, "IC MCU 20P TSSOP20", CREATE_NAME=GordonL@Deftronics, CREATE_TIME=23-Mar-2014, Customer Specific=N/A, DIP&SMD=SMD, MFG=ST, MFG Part=STM8S003F3P6, SAP=T610300083725, Type=IC
U4: library part 2ED2106S06F, "DRIVER 2ED2106S06F DSO-8 INFINEO K", CREATE_NAME=Nathan, CREATE_TIME=14-Apr-2020, Customer Specific=N/A, DIP&SMD=SMD, MFG=Infineon, MFG Part=EG2106, SAP=T610900027257, Type=IC
U5: library part LM358AM, "IC OP-AMP Dual LM358 DUAL OP-AMP SOIC8", Customer Specific=N/A, DIP&SMD=SMD, MFG="National SEMI", MFG Part=LM358AM, SAP=T610500008001, Type="IC AMP", Vendor Code=10020355, Vendor Name="SERIAL MICROELECTRONICS (HK) LIMITE"

## Free pads (board coordinates)
  round 3 hole 1.5: 2(71,15.8)

## Via types
v1: diameter 0.5, hole 0.25, Top Layer to Bottom Layer, tented both sides, 56 vias
v2: diameter 0.5, hole 0.25, Top Layer to Bottom Layer, tented bottom, 7 vias
v3: diameter 0.5, hole 0, Top Layer to Bottom Layer, tented bottom, 4 vias
v4: diameter 0.5/0.5 (per signal layer), hole 0.25, Top Layer to Bottom Layer, tented both sides, 4 vias
v5: diameter 1, hole 0.5, Top Layer to Bottom Layer, 2 vias
v6: diameter 3.5, hole 2.6, Top Layer to Bottom Layer, 2 vias

## Nets (pads, with @x,y where several pads share a name; then routed paths per layer and width w, separated by ;. In a path a pad name is that pad's centre, name@x,y a point inside that pad or via, vN(x,y) a via of type N, cw(c..) or ccw(c..) an arc to the next point about the centre after c; other vN are vias at no path point)
15V: C2.1 C10.1 D4.1 L1.2 R4.1 R5.1 R12.2 | length 69
  Top Layer w0.3: C10.1@21,34.9 R12.2 23.7,34.9 23.85,35.05 24,34.9 24.5,34.9 27.4,32 27.4,29.8 28.4,28.8 31.007,28.8 35,24.807 35,16.276 ; R5.1@28.55,23.3 R5.1 28.55,22.7 28.576,22.7 35,16.276 ; L1.2@59.4,22.2 59.4,21.575 49.625,11.8 39.476,11.8 35,16.276
  other v2: 22.6,35.2
A_SEN: C13.1 R18.2 U3.1 | length 16.6
  Top Layer w0.3: C13.1 R18.2 9.4,32 9.4,22.7 10.675,21.425 U3.1
B: D7.1 K2.4 Q6.3 | length 35.7
  Top Layer w0.3: Q6.3 44.789,29 ; 70.05,57.75 76.85,57.75 79.2,55.4 v5(79.2,35.7) ; 75.85,35.55 v5(76.6,34.8)
  Bottom Layer w0.3: v5(76.6,34.8) 78.3,34.8 v5(79.2,35.7)
BW: R23.1 U3.15 | length 24.1
  Top Layer w0.3: U3.15 19.9,18.175 24,22.275 24,22.901 28.599,27.5 v1(30.8,27.5) ; v1(34,27.6) 35.2,27.6 R23.1
  Bottom Layer w0.3: v1(30.8,27.5) 33.9,27.5 v1(34,27.6)
Err_IDC: LED1.2 U3.13 | length 5.6
  Top Layer w0.3: LED1.2@18.759,13.9 18.646,14.013 17.887,14.013 17.2,14.7 17.2,16.724 17.376,16.9 U3.13@18.8,16.9
F: D6.1 K1.4 Q7.3 | length 47.2
  Top Layer w0.3: 11.625,47.95 11.625,45.875 21.4,36.1 24.924,36.1 25.1,35.924 25.1,34.966 28.1,31.966 28.1,31.1 29.18,30.02 30.932,30.02 31.052,29.9 33.304,29.9 34.577,31.173 34.577,33.277 35.8,34.5 41.204,34.5 41.927,33.777 41.927,33.773 42.55,33.15 42.55,33.05 Q7.3 ; Q7.3@42.9,32.8 45.017,32.8 45.117,32.7
FW: R22.1 U3.16 | length 26.4
  Top Layer w0.3: U3.16 19.94,18.825 23.6,22.485 23.6,23.067 28.533,28 v1(30,28) ; v1(33.9,28.4) 37.55,32.05 R22.1
  Bottom Layer w0.3: v1(30,28) 33.5,28 v1(33.9,28.4)
GND: C2.2 C3.2 C4.2 C5.1 C6.1 C7.2 C8.2 C10.2 C12.2 C13.2 D2.1 J1.2 J2.1 J2.4 J3.4 J4.5 P1.2 pad.2 Q1.2 Q6.2 Q7.2 R6.1 R8.1 R9.2 R21.1 SW1.4 U1.0 U1.7 U2.1 U3.7 U4.4 U5.4 UVLO2.1
  other v1: 74.9,0.2 78.6,0.2 76.8,0.3 18.2,1.6 75,2.7 78.4,2.7 76.6,2.8 40.6,4.1 75,4.5 16.7,5.4 8,5.8 75.1,6 76.6,6 78.2,6 46.715,7.482 50.306,7.646 39.477,7.754 34.3,8 36.158,8.081 29,8.3 18.9,9 51.8,10.4 46.3,10.9 36.865,10.965 41.164,10.965 34.3,11 44.7,13.6 9.9,16 35.9,17.2 75.5,23.1 15.3,23.2 11.2,23.3 13.2,23.3 7.4,24.4 71.9,24.7 7.4,26.4 71.9,26.5 70.5,27 15.6,27.6 16.9,27.6 24.4,27.6 63.4,28.1 27,28.2 70,31.8 75,32.3 36,32.5 58.9,33.3 9.8,34.7 41.3,50.2 68.7,73.9
  other v2: 57.2,20.6 31.9,34.8
  other v4: 74.9,1.5 29.6,11.3 7.4,28.1 2.6,38.3
  other v6: 2.6,35
H/L/BRK: J2.5 U3.5 | length 19.1
  Top Layer w0.3: U3.5@12.7,18.8 14.1,18.8 16.2,16.7 16.2,8.1 16.2,7.2 19.113,4.287 19.113,3.587 J2.5
Hall: J2.2 U3.6 | length 23.6
  Top Layer w0.3: J2.2 11.9,2.1 12.6,1.4 15.6,1.4 15.776,1.576 15.776,2.663 15.75,2.689 15.75,16.55 14.125,18.175 U3.6@13.225,18.175
HI: U3.17 U4.2 | length 19.3
  Top Layer w0.3: U3.17 19.975,19.475 23.2,22.7 23.2,23.4 25.9,26.1 25.9,31.2 25.606,31.494 25.561,31.494 25.055,32 U4.2@24.4,32 ; v3@22.5,32.2 22.554,32.2 22.769,31.985 U4.2
  other v3: 22.3,32.2
HO: D3.2 R11.1 U4.7 | length 24.2
  Top Layer w0.3: U4.7@29.9,32 32.5,32 35.4,34.9 R11.1
  Bottom Layer w0.3: 30,37.9 30.1,37.8 v2(30.1,31.9)
LI: U3.19 U4.3 | length 16
  Top Layer w0.3: U3.19 20.575,20.775 22.8,23 22.8,30.539 22.976,30.715 23.085,30.715 U4.3@23.985,30.715 ; v3@22.5,31.3 23.4,31.3 23.657,31.043 23.657,30.978 23.92,30.715 U4.3@23.985,30.715 ; U4.3 U4.3@23.985,30.715
  other v3: 22.4,31.3
LO: D5.2 R15.1 U4.5 | length 8.3
  Top Layer w0.3: U4.5 30.067,29.378 31.222,29.378 34,26.6 ; R15.1@49.5,14.6 R15.1@49.6,14.7
  Bottom Layer w0.3: D5.2 v2@49.5,14.5
  other v2: 49.4,14.5
M1: K1.5 K1.6 K1.7 P2.1 P3.1 R10.1 | length 49.7
  Top Layer w0.5: P3.1@37,71.9 37,73.4 37,76.5 P3.1@38.1,77.6 ; P3.1@38,77.5 38.9,78.4 R10.1
  Top Layer w3: 37.9,71.2 P3.1@37.9,72.1
  Bottom Layer w3: 9.3,42.175 21.175,42.175 23.6,44.6 ; 23.5,44.6 23.5,44.775 23.5,52.95
M2: C9.1 K2.5 K2.6 K2.7 P2.2 P3.2 | length 33.6
  Top Layer w0.5: C9.1 56.614,75.886 63.8,68.7 67.125,68.7 72.2,63.625
  Top Layer w3: 45.8,52.9 45.9,53
  Bottom Layer w3: 58,61 60.525,63.525 ; 58.1,52.7 58.1,52.75 58.1,60.925
MOS_DET: U3.20
NetC1_1: C1.1 U1.1 | length 7.3
  Top Layer w0.3: C1.1 70.85,24.276 71.026,24.1 73.324,24.1 73.5,24.276 U1.1@73.5,27.3
NetC1_2: C1.2 D2.2 L1.1 U1.8 | length 6.7
  Top Layer w0.3: L1.1 68.525,23.2 69.5,24.175 69.5,24.2 ; U1.8 67.655,27.495 C1.2 69.4,25.75 C1.2@69.4,25.7 ; C1.2@69.4,25.9 C1.2@69.45,25.85
NetC5_2: C5.2 R5.2 U2.2 U2.4 | length 3.9
  Top Layer w0.3: U2.2 C5.2 R5.2@26.7,23.2
NetC7_1: C7.1 R7.1 U1.6 | length 3.7
  Top Layer w0.3: C7.1@65,30.1 65.065,30.035 U1.6 ; C7.1 65.05,31.55 R7.1@65.1,31.6
NetC8_1: C8.1 R7.2 | length 2.4
  Top Layer w0.3: R7.2@65,33.1 67,33.1 C8.1
NetC9_2: C9.2 R10.2 | length 1.6
  Top Layer w0.5: C9.2@58,76.9 58.15,77.05 R10.2
NetC11_1: C11.1 R14.1 U4.6 | length 13.4
  Top Layer w0.3: C11.1@28.7,35 28.7,31.44 29.425,30.715 U4.6
  Bottom Layer w0.3: v2@30,30.7 36.25,30.7 R14.1
  other v2: 29.9,30.6
NetC11_2: C11.2 D4.2 U4.8 | length 5.5
  Top Layer w0.3: C11.2 28.25,36 29.3,36 30,35.3 U4.8 U4.8@30,33.2
  other v2: 27.1,35.4
NetD1_1: D1.1 J1.1 R1.2 | length 18.1
  Top Layer w0.5: R1.2 66.55,71.5 D1.1@72.5,71.5 ; D1.1@72.6,71.4 D1.1 72.6,76.25 J1.1
NetD3_1: D3.1 Q2.1 Q3.1 R11.2 R13.2 | length 13
  Top Layer w0.5: 38.8,36.1 47.6,36.1 ; 48.15,35.55 48.15,35.1 R11.2 ; R11.2@48.25,35 R11.2@48.5,35 ; R11.2@48.368,34.9 51.1,34.9 ; Q3.1@53.087,37.954 Q3.1
  Bottom Layer w0.5: Q3.1@53.4,38 Q3.1@53.619,38.219
NetD5_1: D5.1 Q4.1 Q5.1 R15.2 R16.2 | length 0.1
  Bottom Layer w1.5: D5.1@42.229,14.588 D5.1
NetJ2_3: J2.3 R3.1 | length 7.9
  Top Layer w0.3: R3.1 10.4,7.3 14.3,3.4 J2.3@14.3,3.2 ; J2.3@14.35,3.25 J2.3@14.65,2.95
NetK1_2: K1.2 K2.2 Q2.3 Q3.3 Q4.2 Q5.2 R13.1 R14.2 | length 27.5
  Top Layer w1.5: Q5.2@36.75,21.45 Q5.2 Q5.2@36.781,21.4 ; K1.2@36.85,40.65 K1.2@36.9,40.7 ; 73.618,48.393 73.7,48.475
  Top Layer w2: 7.9,57.225 8,57.125 8,55.472 9.172,54.3 15.5,54.3 20.3,49.5 30.4,49.5
  Bottom Layer w0.5: Q3.3@53.5,43.2 Q3.3@53.762,42.938
  Bottom Layer w1.5: Q5.2@36.561,21.343 Q5.2@36.64,21.421
  other v1: 42.1,27.5 42.2,30.9
NetLED1_1: LED1.1 R2.1 | length 2.1
  Top Layer w0.3: R2.1 20.85,15.4 LED1.1@20.85,13.7 ; LED1.1@20.95,13.7 20.95,13.55 LED1.1@21,13.5
NetQ1_1: Q1.1 R1.1 R6.2 | length 3.4
  Top Layer w0.5: R1.1 63.15,76.6 64.8,76.6 64.85,76.55 64.85,75.2 R6.2
NetQ4_3: Q4.3 Q5.3 R16.1 R17.2 | length 13.2
  Top Layer w0.5: R17.2 10.5,26.8 12.493,24.807 19.807,24.807 v6(19.9,24.9)
  Top Layer w1.5: Q5.3 Q5.3@36.781,23.95 ; Q4.3@36.719,43.25 Q4.3
  Bottom Layer w1.5: v6(19.9,24.9) v6@20.441,24.9
NetQ6_1: Q6.1 R23.2 | length 3.3
  Top Layer w0.3: v3(38.5,31) 38.5,30.3 R23.2@39,29.8 ; R23.2@39,30 40.5,30 40.625,29.875 40.7,29.8 Q6.1
NetQ7_1: Q7.1 R22.2 | length 3.3
  Top Layer w0.3: v3@38.6,32.3 39.05,32.75 R22.2@39.05,33.6 ; R22.2 R22.2@39.05,33.6 ; Q7.1 40.65,33.6 R22.2@39.05,33.6
  other v3: 38.5,32.2
NetR4_2: R4.2 R9.1 U1.5 | length 14.1
  Top Layer w0.3: R4.2 R9.1 55.9,31.5 61.7,31.5 62.6,32.4 65.63,32.4 66.725,31.305 U1.5
NetR8_2: R8.2 U1.4 | length 2.1
  Top Layer w0.3: R8.2 72.85,33.15 72.85,31.35 U1.4@72.9,31.3
NetR12_1: R12.1 U4.1 | length 2.2
  Top Layer w0.3: R12.1 22.745,33.255 U4.1 24.645,33.255 U4.1@24.7,33.2
NetR17_1: R17.1 U5.3 | length 1.9
  Top Layer w0.3: R17.1@10.2,30.7 10.235,30.665 U5.3 12.065,30.665 U5.3@12.1,30.7
NetR18_1: R18.1 R20.2 U5.1 | length 4.5
  Top Layer w0.3: R18.1 9.705,33.205 U5.1 U5.1@12.1,33.205 ; R20.2 12.1,34.1 U5.1@12.1,33.205 ; U5.1@12.1,33.1 U5.1@12.1,33.205 ; U5.1@12.2,33.2 12.195,33.205 U5.1@12.1,33.205
NetR20_1: R20.1 R21.2 U5.2 | length 10.5
  Top Layer w0.3: U5.2 12.625,31.935 13.9,33.21 ; R20.1@12.8,34.8 12.924,34.676 13.724,34.676 13.9,34.5 13.9,33.21 ; R21.2 13.9,27.7 13.9,33.21
NetU1_3: U1.3 UVLO1.1 UVLO2.2 | length 5.6
  Top Layer w0.5: U1.3 73.443,30.035 73.978,29.5 76.4,29.5 ; UVLO2.2@76.2,30.4 76.4,30.2 76.4,29.5 ; UVLO1.1 76.4,29.5
OCP/TX: J3.3 U3.2 | length 9.4
  Top Layer w0.3: J3.3 7.2,22.1 8.5,20.8 12.825,20.8 U3.2
PLC: U3.11
RST: J4.4 U3.4 | length 23.8
  Top Layer w0.3: J4.4 2.1,7.6 2.1,17 2.5,17.4 6.7,17.4 8.775,19.475 12.775,19.475 U3.4@12.8,19.5
RX: J3.2 U3.3 | length 18.8
  Top Layer w0.3: J3.2 2.2,22.8 2.2,18.076 2.376,17.9 6.2,17.9 8.425,20.125 U3.3@12.775,20.125
SCL: J4.3 Q1.3 U3.18 | length 186.3
  Top Layer w0.3: J4.3 5.924,8.2 6.1,8.024 6.1,1 6.3,0.8 20.524,0.8 20.7,0.976 20.7,4 16.7,8 16.7,19.9 ; U3.18@18.575,20.125 16.925,20.125 16.7,19.9 ; Q1.3 64.8,79.8 6.7,79.8 1.8,74.9 1.8,43.5 7.4,37.9 17.1,37.9 19.5,35.5 19.5,33.3 22.2,30.6 22.2,23.8 20.8,22.4 17.3,22.4 16.7,21.8 16.7,19.9
SDA: J4.2 U3.8 | length 19.9
  Top Layer w0.3: J4.2 4.351,10.7 5.251,9.8 14.8,9.8 15.3,10.3 15.3,16 14.425,16.875 U3.8@13.325,16.875
SW: SW1.2 U3.12 | length 5.8
  Top Layer w0.3: U3.12 19.724,16.225 19.9,16.049 19.9,12.826 20.063,12.663 20.063,12.087 SW1.2
V_Bat: C3.1 C4.1 D1.2 D6.2 D7.2 K1.1 K1.3 K2.1 K2.3 P1.1 Q2.2 Q3.2 U1.2 UVLO1.2 | length 142.5
  Top Layer w0.5: U1.2 72.882,28.733 UVLO1.2@74.867,28.733 ; UVLO1.2 74.9,26.25 74.3,25.65 74.3,25.6 76.807,25.6 77.6,26.393 77.6,43.1 76.7,44
  Top Layer w1: 69.9,54 69.517,54.383 66.286,54.383 65.7,54.968 65.7,60.014 66.286,60.6 75.2,60.6 77.68,63.08 D1.2
  Top Layer w1.5: C3.1 6.89,68.644 P1.1@17.144,68.644 ; 11.625,51.7 11.7,51.7 ; 11.625,57.225 11.625,63.125 P1.1@17.144,68.644 ; P1.1@31.1,68.8 26.3,68.8 22.1,68.8 17.3,68.8 P1.1@17.144,68.644 ; Q3.2@53.213,40.644 Q3.2 ; Q3.2@53.4,40.8 58.8,40.8 73.5,40.8 76.7,44 76.7,52.4 75.1,54 69.975,54 69.975,48.475
V_DET: U3.14
VDD: C6.2 C12.1 J2.6 J3.1 J4.1 R2.2 R3.2 U2.3 U3.9 U5.8 | length 123.8
  Top Layer w0.3: R3.2 10.7,10.85 10.85,10.85 14.4,14.4 14.4,16.024 14.199,16.225 U3.9@12.925,16.225 ; R3.2@10.5,10.5 8.5,10.5 5.8,13.2 J4.1 3.15,12.35 3.15,11.618 2.75,11.218 2.75,7.682 3.482,6.95 4.518,6.95 5.25,6.218 5.25,5.182 4.518,4.45 1.65,4.45 1.6,4.5 ; U5.8@17.6,33.2 17.6,35.824 17.424,36 7.7,36 6.4,34.7 6.4,29.5 J3.1 2.1,27.1 1.6,26.6 1.6,4.5 ; J2.6 21.9,0.8 21.477,0.377 4.123,0.377 1.6,2.9 1.6,4.5 ; J2.6@21.9,3.4 21.9,3.706 22.2,4.006 22.2,15.45 R2.2 ; R2.2@22.25,15.65 C12.1@22.25,17.1 ; C12.1@22.4,17.1 22.4,17.35 22.55,17.5 23.2,17.5 24.65,18.95 24.95,18.95 25.2,19.2 U2.3 25.149,19.551 C6.2@25.149,21.551
pads on no net: SW1.1 SW1.3 U3.10 U5.5 U5.6 U5.7

## Polygon pours and split planes (outlines as drawn)
GND on Bottom Layer "NONET_L02_P007" (solid, remove dead copper, shelved, pour order 7): 0,0 0.3,-0.3 80,-0.3 80,80.4 0,80.4
GND on Top Layer "gm" (solid, remove dead copper, shelved, pour order 3): -0.1,80.5 0,80.4 0,0 80,0 80.1,-0.1 80.1,80.4 80,80.5

## Keep-outs
Keep-Out Layer:
  the board outline again, w0.254

## Other copper
Top Layer:
  region net 15V: 55.3,29.2 58.3,29.2 58.3,29.3 59.2,30.2 61.3,30.2 61.4,30.1 61.4,27.5 61.5,27.4 61.5,21.3 59.1,21.3 55.3,25.1
  region net M1: 22,54.5 27.8,58.1 41.9,58.5 41.9,51.4 22,51.4
  region net V_Bat: 6.8,71 7.5,71 33.4,71 33.7,70.7 33.7,65.6 27.3,58.4 22.5,55.7 10.2,55.7 10.2,60.2 5.6,64.8 5.6,71.3 5.6,71
  region net M1: 35.7,66.75 35.7,66.267 35.7,66.75 35.7,79 41.9,79 41.9,51.7 22,51.7
  region net NetK1_2: 19.721,46.9 13.7,53.367 13.7,55.3 20.6,55.3 21,54.9 21,46.9
  region net NetC1_2: 68.2,27.7 64.7,27.7 64.6,21.2 65.5,20.3 69.4,20.3 69.8,20.7 69.8,26.9
  region net M2: 43.5,76.6 52.7,76.6 60.6,68.7 60.6,51.7 59,50.1 44.6,50.1 43.5,51.2
Bottom Layer:
  region net NetD3_1: 55,39 50.8,39 47.6,35.8 47.6,17.2 53.6,17.2 54.2,17.8 54.2,19.5 53.7,20 51.7,20 50.7,21 50.7,35.7 54.4,35.7 55,36.3
  region net M2: 73.9,61.9 61.9,61.9 66,66 57.4,66 55.4,64 55.4,50.1 59.2,50.1 61.5,52.4 61.5,60.6 72.4,60.6 73.9,62.1 73.9,65.2 71.8,67.3 56.6,67.3 55.3,66 55.3,49.9 55.4,49.8 59.9,49.8 62.6,52.5 62.6,60.3 64.2,61.9
  region net NetQ4_3: 37.5,22.9 37.3,25.3 22.3,25.3 22.1,25.5 19.5,22.9 18.2,22.9 18.1,23 18.1,26.7 18.9,27.5 20.6,27.5 22.7,25.4 37.8,25.6 37.8,22.9 18,22.9 18,27.7 22.2,27.7 24.3,25.6 37.5,25.6
  region net V_Bat: 13.4,58.7 14.6,57.5 14.6,51 13.7,50.1 10,50.1 10,58.6 10.1,58.7
  region net M1: 7.8,45 20.9,45 22,46.1 22,54.4 22.2,54.6 26.7,54.6 26.7,41.6 25.2,40.1 7.3,40.1 7.3,44.5

## Silkscreen, mask and mechanical layers (free items; w line width, h text height)
Top Overlay:
  lines w0.254: 4.5,33.4 4.5,33.6 5.5,34.6 6.9,34.6 ; 6.6,34 7,34.4 7,34.7 6.6,35.1
  lines w1: 30.9,21.5 32.3,21.5 ; 31,40.7 32.5,40.7 ; 31.1,31.1 32.5,31.1 ; 46.8,31.1 48.5,31.1 ; 46.9,40.6 48.2,40.6 ; 47,21.5 48.6,21.5
  lines w2.2: 26.8,1.5 26.8,12.5 ; 26.911,1.489 37.911,1.489 ; 27.2,50.7 27.2,61.637 38.219,61.637 ; 32.5,1.589 32.5,61.589 ; 38,1.8 38,12.8 ; 42.819,1.5 42.819,12.5 ; 42.93,1.489 53.93,1.489 ; 43.219,50.7 43.219,61.637 54.238,61.637 ; 48.6,1.6 48.6,61.6 ; 54.019,1.8 54.019,12.8 ; 54.319,50.5 54.319,61.5
  text "RADIOFLYER" at 56.3,11.552 h4
  text "RF 36V Controller V2.0" at 56.1,7.962 h2.5
  text "Dec 1th 2021" at 56.198,4.97 h2.5
  text "PD" at 56.3,2.104 h2.5
Bottom Overlay:
  text "RADIOFLYER" at 79.3,11.352 h4
  text "36V series motor controller" at 79.3,8.971 h2

## Text inside footprints (layer, text, board x,y; h text height)
J1: Top Overlay "2" at 69.824,77.746 h1; Top Overlay "1" at 72.668,77.67 h1; Bottom Overlay "2" at 69.062,75.917 h1; Bottom Overlay "1" at 74.243,76.044 h1
J2: Top Overlay "1" at 8.15,4.85 h1 r180; Top Overlay "6" at 23.575,4.85 h1 r180
J3: Top Overlay "4" at 2.73,19.083 h1 r90; Top Overlay "1" at 2.73,27.018 h1 r90; Bottom Overlay "4" at 4.508,18.25 h1 r90; Bottom Overlay "1" at 4.356,28.593 h1 r90
J4: Top Overlay "1" at 4.432,15.922 h1 r90; Top Overlay "5" at 4.305,-0.157 h1 r90; Bottom Overlay "1" at 4.356,14.693 h1 r90; Bottom Overlay "5" at 4.508,1.901 h1 r90
K1: Top Overlay "Coil" at 39.45,47.6 h0.6 r270; Top Overlay "Coil" at 39.45,51.55 h0.6 r270; Bottom Overlay "COM" at 33.95,62.401 h0.6 r270; Bottom Overlay "COM" at 16.925,52.651 h0.6 r270; Bottom Overlay "COM" at 16.875,44.326 h0.6 r270; Bottom Overlay "NC" at 34.975,34.326 h0.6 r270; Bottom Overlay "NO" at 31.15,34.276 h0.6 r270
K2: Top Overlay "Coil" at 42.15,54.15 h0.6 r90; Top Overlay "Coil" at 42.15,58.1 h0.6 r90; Bottom Overlay "NO" at 50.45,71.424 h0.6 r90; Bottom Overlay "NC" at 46.625,71.374 h0.6 r90; Bottom Overlay "COM" at 64.725,61.374 h0.6 r90; Bottom Overlay "COM" at 64.675,53.049 h0.6 r90; Bottom Overlay "COM" at 47.65,43.299 h0.6 r90